# EAGLE board Dragino Pan.v2.0.1 (EAGLE 7.5.0), part 1 of 2
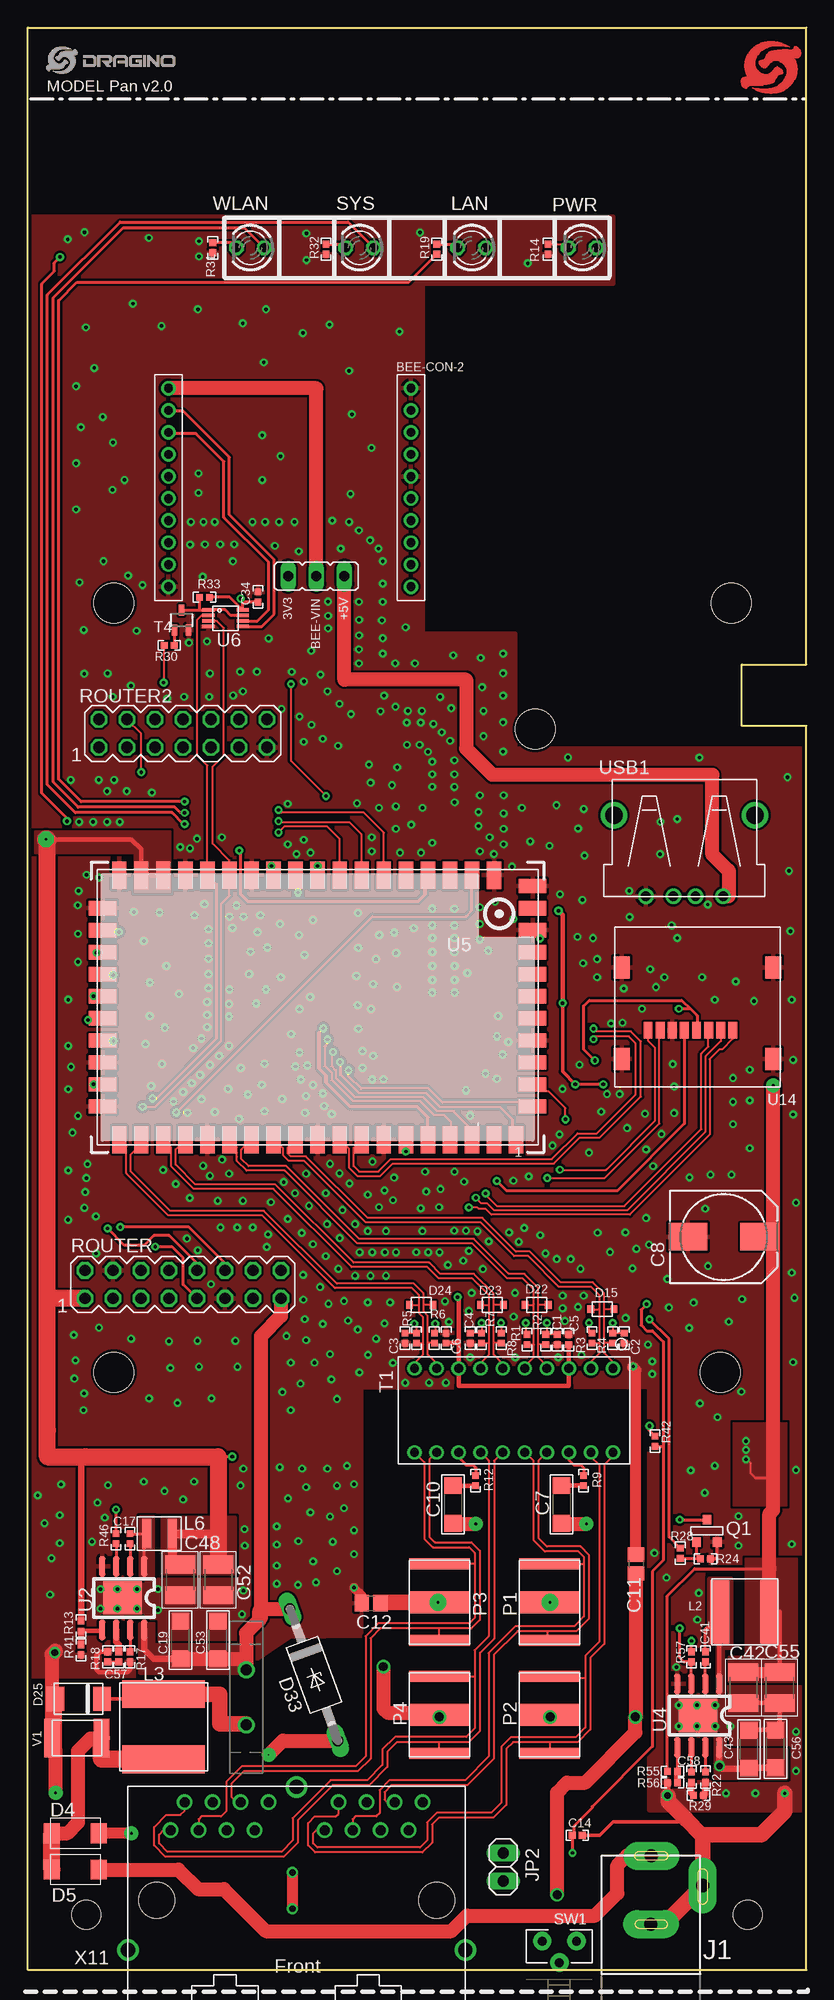
[diagram p0: board, top side]
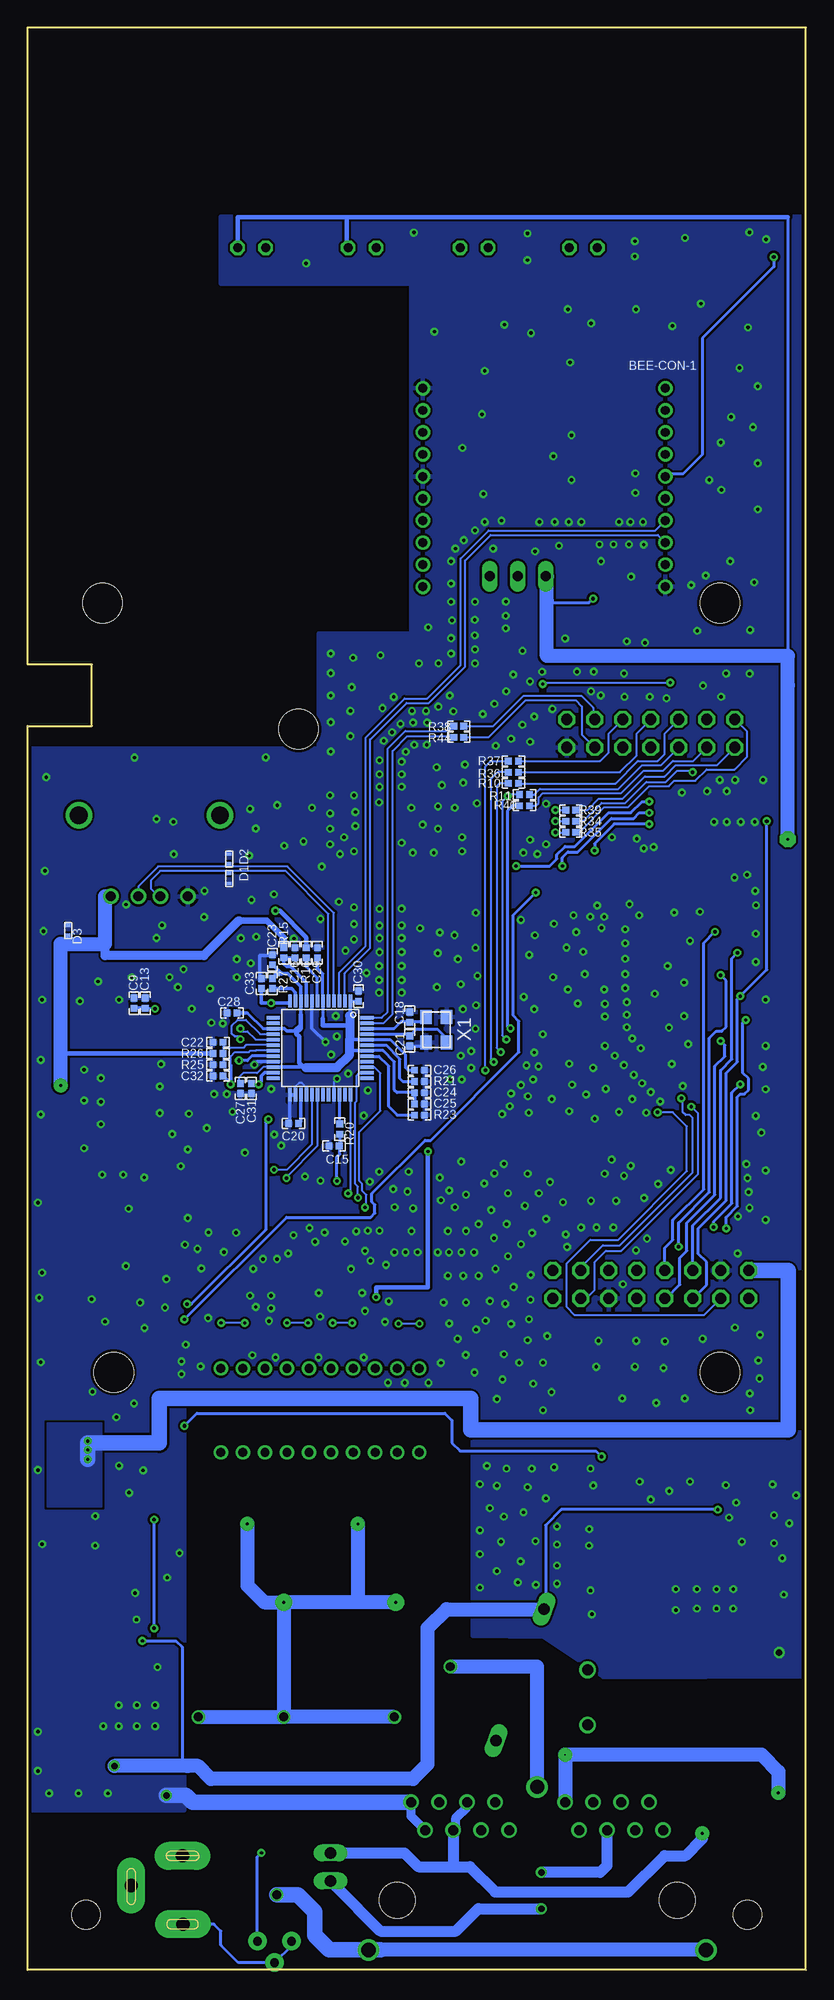
[diagram p1: board, bottom side, seen from below]

Size 70.61 x 176.23 mm. Coordinates in mm from the lower left corner, seen from the top.
Outline: 0,0 70.61,0 70.61,112.86 64.77,112.86 64.77,118.45 70.61,118.45 70.61,176.23 0,176.23 0,0
Copper layers (1*16): Top 0.035mm / dielectric 1.5mm / Bottom 0.035mm
Design rules "default *": minimum track width 8mil, minimum drill 12mil, track to track 8mil, track to pad 8mil, pad to pad 6mil, via to via 8mil, smd to smd 8mil, copper to edge 10mil, drill to drill 8mil, minimum pad ring 10mil, minimum via ring 8mil, stop-mask expansion 1mil, vias tented up to drill 30mil, thermal gap 10mil
Net classes: 0 default: clearance 0.205 mm; 2 gnd: width 0.305 mm, drill 0.33 mm, clearance 0.254 mm; 3 usbvcc: width 0.254 mm, drill 0.61 mm, clearance 0.254 mm; 5 usbtrace: width 0.254 mm, clearance 0.152 mm; 6 usbtrace-4layer: width 0.191 mm, clearance 0.203 mm
Holes 3.6 mm at 62.81,54.22 7.81,54.22 63.81,124 7.81,124 46.03,112.57
Holes 2.6 mm at 65.31,5 5.31,5
tKeepout: area 4.8,53 to 10.8,59; area 59.8,53 to 65.8,59; area 60.8,121 to 66.8,127; area 4.8,121 to 10.8,127

## Footprints (pad centres in the part's own frame; a part is rotated, then mirrored left to right if it is on the bottom)
10P-2.0MM = drill 0.8 pad 1.27: 1 0,9; 2 0,7; 3 0,5; 4 0,3; 5 0,1; 6 0,-1; 7 0,-3; 8 0,-5; 9 0,-7; 10 0,-9
JP2 = drill 0.914 long: 1 -2.54,0; 2 0,0; 3 2.54,0
C0402 = smd 0.61 x 0.61: 1 -0.457,0; 2 0.457,0
C1206 = smd 1.52 x 1.6: 1 -1.71,0; 2 1.71,0
140CLH-0810 = smd 3.5 x 2.5: + 3.25,0; - -3.25,0
C0805 = smd 1.3 x 1.5: 1 -0.85,0; 2 0.85,0
C1210 = smd 1.6 x 2.7: 1 -1.4,0; 2 1.4,0
SOD−923 = smd 0.3 x 0.4: P$1 -0.45,0; P$2 0.45,0
DO214AC = smd 1.45 x 1.8: A 2.13,0; C -2.13,0
SOD−323 = smd 0.6 x 0.7: P$1 -1.05,0; P$2 1.05,0
DO-214AA = smd 1.62 x 2.18: A 2.11,0; C -2.11,0
F126Z12 = drill 1.016 long: A 6.35,0; C -6.35,0
GR72-135 = drill 1: P$1 -2.5,0; P$2 2.5,0
POWER_JACK_SLOT = drill 1.2 pad 2.54 long: GND@1 0,0; GND@2 4.7,3.5; PWR 0.04,6.2
1X02 = drill 1.016 long: 1 -1.27,0; 2 1.27,0
SWPA6028S = smd 5.7 x 1.7: P$1 0,2.25; P$2 0,-2.25
LVS808040 = smd 2.5 x 7.5: P$1 -2.95,0; P$2 2.95,0
SWPA3010S = smd 0.8 x 2.7: P$1 -1.15,0; P$2 1.15,0
LED3MM = drill 0.813 octagon: A -1.27,0; K 1.27,0
GDT-LT-B3D090L = smd 1 x 5.5: 1 -3.48,0; 3 3.48,0 | smd 2 x 5.5: 2 0,0
SOT-23 = smd 0.787 x 0.889: 1 0,-1.016; 2 -0.95,1.016; 3 0.95,1.016
R0402 = smd 0.61 x 0.61: 1 -0.457,0; 2 0.457,0
MA08-2 = drill 1.016 octagon: 1 -8.89,-1.27; 2 -8.89,1.27; 3 -6.35,-1.27; 4 -6.35,1.27; 5 -3.81,-1.27; 6 -3.81,1.27; 7 -1.27,-1.27; 8 -1.27,1.27; 9 1.27,-1.27; 10 1.27,1.27; 11 3.81,-1.27; 12 3.81,1.27; 13 6.35,-1.27; 14 6.35,1.27; 15 8.89,-1.27; 16 8.89,1.27
MA07-2 = drill 1.016 octagon: 1 -7.62,-1.27; 2 -7.62,1.27; 3 -5.08,-1.27; 4 -5.08,1.27; 5 -2.54,-1.27; 6 -2.54,1.27; 7 0,-1.27; 8 0,1.27; 9 2.54,-1.27; 10 2.54,1.27; 11 5.08,-1.27; 12 5.08,1.27; 13 7.62,-1.27; 14 7.62,1.27
TS-026 = drill 0.8 pad 1.676: 1 -1.55,-0.975; 2 1.55,-0.975; 3 0,0.975
RIONET_H2038 = drill 0.8: 1 -3.81,9; 2 -3.81,7; 3 -3.81,5; 4 -3.81,3; 5 -3.81,1; 6 -3.81,-1; 7 -3.81,-3; 8 -3.81,-5; 9 -3.81,-7; 10 -3.81,-9; 11 3.81,-9; 12 3.81,-7; 13 3.81,-5; 14 3.81,-3; 15 3.81,-1; 16 3.81,1; 17 3.81,3; 18 3.81,5; 19 3.81,7; 20 3.81,9
SOT323 = smd 0.5 x 1: 1 0,0.9; 2 -0.65,-0.9; 3 0.65,-0.9
RT8250-SOP8 = smd 1.88 x 0.61: 1 -1.219,0; 2 -1.219,-1.27; 3 -1.219,-2.54; 4 -1.219,-3.81; 5 4.547,-3.81; 6 4.547,-2.54; 7 4.547,-1.27; 8 4.547,0 | smd 2.997 x 3.505: 9 1.651,-1.956
AU6350_LQFP-48 = smd 1.2 x 0.3: 1 -4.25,2.75; 2 -4.25,2.25; 3 -4.25,1.75; 4 -4.25,1.25; 5 -4.25,0.75; 6 -4.25,0.25; 7 -4.25,-0.25; 8 -4.25,-0.75; 9 -4.25,-1.25; 10 -4.25,-1.75; 11 -4.25,-2.25; 12 -4.25,-2.75; 25 4.25,-2.75; 26 4.25,-2.25; 27 4.25,-1.75; 28 4.25,-1.25; 29 4.25,-0.75; 30 4.25,-0.25; 31 4.25,0.25; 32 4.25,0.75; 33 4.25,1.25; 34 4.25,1.75; 35 4.25,2.25; 36 4.25,2.75 | smd 0.3 x 1.2: 13 -2.75,-4.25; 14 -2.25,-4.25; 15 -1.75,-4.25; 16 -1.25,-4.25; 17 -0.75,-4.25; 18 -0.25,-4.25; 19 0.25,-4.25; 20 0.75,-4.25; 21 1.25,-4.25; 22 1.75,-4.25; 23 2.25,-4.25; 24 2.75,-4.25; 37 2.75,4.25; 38 2.25,4.25; 39 1.75,4.25; 40 1.25,4.25; 41 0.75,4.25; 42 0.25,4.25; 43 -0.25,4.25; 44 -0.75,4.25; 45 -1.25,4.25; 46 -1.75,4.25; 47 -2.25,4.25; 48 -2.75,4.25
DRAGINO_HE-4025 = smd 1.3 x 2.5: 1 -18,12; 2 -16,12; 3 -14,12; 4 -12,12; 5 -10,12; 6 -8,12; 7 -6,12; 8 -4,12; 9 -2,12; 10 0,12; 11 2,12; 12 4,12; 13 6,12; 14 8,12; 15 10,12; 16 12,12; 17 14,12; 18 16,12; 19 18,12; 30 18,-12; 31 16,-12; 32 14,-12; 33 12,-12; 34 10,-12; 35 8,-12; 36 6,-12; 37 4,-12; 38 2,-12; 39 0,-12; 40 -2,-12; 41 -4,-12; 42 -6,-12; 43 -8,-12; 44 -10,-12; 45 -12,-12; 46 -14,-12; 47 -16,-12 | smd 2.5 x 1.3: 20 19.5,9; 21 19.5,7; 22 19.5,5; 23 19.5,3; 24 19.5,1; 25 19.5,-1; 26 19.5,-3; 27 19.5,-5; 28 19.5,-7; 29 19.5,-9; 48 -19.5,-11; 49 -19.5,-9; 50 -19.5,-7; 51 -19.5,-5; 52 -19.5,-3; 53 -19.5,-1; 54 -19.5,1; 55 -19.5,3; 56 -19.5,5; 57 -19.5,7; 58 -19.5,9
US8 = smd 0.3 x 1.1: 1 -0.75,-1.55; 2 -0.25,-1.55; 3 0.25,-1.55; 4 0.75,-1.55; 5 0.75,1.55; 6 0.25,1.55; 7 -0.25,1.55; 8 -0.75,1.55
RIONET_472192001_SD = smd 0.8 x 1.5: 1 3.2,-1.55; 2 2.1,-1.55; 3 1,-1.55; 4 -0.1,-1.55; 5 -1.2,-1.55; 6 -2.3,-1.55; 7 -3.4,-1.55; 8 -4.5,-1.55 | smd 1.45 x 2: G1 6.875,-4.15; G2 6.875,4.15; G3 -6.875,4.15; G4 -6.875,-4.15
USB_C42562 = drill 0.9: 1 -3.5,5.29; 2 -1,5.29; 3 1,5.29; 4 3.5,5.29 | drill 1.6: P$1 -6.4,-2.06; P$2 6.4,-2.06
BC301N-D = smd 1.4 x 3.5: P$1 -2.25,0; P$2 2.25,0
SMARTPRJ_CRYSTAL-3.2-2.5 = smd 1.3 x 1.05: 1 -1.15,-0.925; 2 1.15,-0.925; 3 1.15,0.925; 4 -1.15,0.925
EHERNET-1X2-PLASTIC1 = drill 0.9: 1-1 2.54,-7.49; 1-2 3.81,-4.95; 1-3 5.08,-7.49; 1-4 6.35,-4.95; 1-5 7.62,-7.49; 1-6 8.89,-4.95; 1-7 10.16,-7.49; 1-8 11.43,-4.95; 2-1 -11.43,-7.49; 2-2 -10.16,-4.95; 2-3 -8.89,-7.49; 2-4 -7.62,-4.95; 2-5 -6.35,-7.49; 2-6 -5.08,-4.95; 2-7 -3.81,-7.49; 2-8 -2.54,-4.95 | drill 1.3: P$1 0,-8.89; P$2 -15.3,5.9; P$3 15.3,5.9 | hole 3.25: -12.7,1.4; 12.7,1.4

## Placement (x,y rotation side)
BEE-CON-1  BEE-1  [10P-2.0MM]  12.75,134.5 0 top
BEE-CON-2  BEE-1  [10P-2.0MM]  34.75,134.5 0 top
BEE-VIN  1x3 , 2.54 弯针  [JP2]  26.16,126.45 0 top
C1  0.1uF  [C0402]  48.03,57.19 270 top
C2  0.1uF  [C0402]  54.09,57.32 270 top
C3  0.1uF  [C0402]  34.22,57.32 270 top
C4  0.1uF  [C0402]  40.13,57.32 270 top
C5  0.1uF  [C0402]  49.07,57.19 90 top
C6  0.1uF  [C0402]  37.94,57.32 90 top
C7  1000pF 2kv  [C1206]  48.42,42.23 270 top
C8  470uF 10v  [140CLH-0810]  63.12,66.5 0 top
C9  0.1uF  [C0402]  60.96,87.71 90 bottom
C10  1000pF 2kv  [C1206]  38.58,42.23 270 top
C11  0.1uF,100V  [C0805]  55.15,36.83 270 top
C12  0.1uF,100V  [C0805]  31.14,33.26 0 top
C13  1uF  [C0402]  59.94,87.71 90 bottom
C14  1pf  [C0402]  49.84,12.2 0 top
C15  10pf,NL  [C0402]  42.8,74.76 180 bottom
C16  2.2uF  [C0402]  46.35,92.29 90 bottom
C17  0.1u,50v  [C0402]  9.27,39.12 90 top
C18  18pF  [C0402]  35.94,86.44 90 bottom
C19  10uf,50v  [C1206]  13.84,29.93 90 top
C20  1uF  [C0402]  46.48,76.79 180 bottom
C21  18pF  [C0402]  35.94,84.28 270 bottom
C22  1uF  [C0402]  53.34,84.16 180 bottom
C23  4.7uF  [C0402]  48.39,91.65 90 bottom
C24  4.7uF  [C0402]  35.05,79.59 0 bottom
C25  1uF  [C0402]  35.05,78.57 0 bottom
C26  4.7uF  [C0402]  35.05,81.62 0 bottom
C27  0.1uF  [C0402]  51.31,79.97 270 bottom
C28  0.1uF  [C0402]  52.07,86.83 180 bottom
C29  0.1uF  [C0402]  44.32,92.29 90 bottom
C30  0.1uF  [C0402]  40.59,88.35 90 bottom
C31  4.7uF  [C0402]  50.29,79.97 270 bottom
C32  4.7uF  [C0402]  53.34,81.11 180 bottom
C33  0.1uF  [C0402]  49.4,89.49 90 bottom
C34  0.1u  [C0402]  20.88,124.57 90 top
C41  0.1u,50v  [C0402]  61.47,28.41 90 top
C42  22uf,10v  [C1210]  64.9,25.61 270 top
C43  10uf,50v  [C1206]  65.41,20.02 90 top
C48  22uF,10v  [C1210]  13.82,35.39 270 top
C52  22uF,10v  [C1210]  17.27,35.39 270 top
C53  10uf,50v  [C1206]  17.25,29.93 90 top
C55  22fu,10v  [C1210]  68.2,25.61 270 top
C56  10uf,50v  [C1206]  67.82,20.05 90 top
C57  2.7nf  [C0402]  8.25,28.41 90 top
C58  2.7nf  [C0402]  60.2,17.48 90 top
D1  ESD7951ST5G  [SOD−923]  52.32,99.02 270 bottom
D2  ESD7951ST5G  [SOD−923]  52.32,100.8 90 bottom
D3  ESD7951ST5G  [SOD−923]  66.93,94.32 90 bottom
D4  STPS1L30  [DO214AC]  4.32,12.4 0 top
D5  STPS1L30  [DO214AC]  4.32,9.1 0 top
D15  BS05C  [SOD−323]  52.11,59.95 0 top
D22  BS05C  [SOD−323]  46.15,60.33 0 top
D23  BS05C  [SOD−323]  42.11,60.33 0 top
D24  BS05C  [SOD−323]  35.69,60.33 0 top
D25  SMBJ43A  [DO-214AA]  4.61,24.59 180 top
D33  1N4001  [F126Z12]  25.94,26.77 290 top
F2  GRD-GR72-135 1.35A  [GR72-135]  19.81,24.72 90 top
J1  POWER_JACKSLT  [POWER_JACK_SLOT]  56.52,4.15 0 top
JP2  [1X02]  43.13,9.33 270 top
L2  6.8uH / SWPA6045S6R8MT  [SWPA6028S]  65.02,32.47 90 top
L3  100uH, 1.4A, LVS808040-101  [LVS808040]  12.32,22.06 90 top
L6  4.7uH /SWPA3015S4R7MT  [SWPA3010S]  11.94,39.58 0 top
LAN  [LED3MM]  40.26,156.25 180 top
P1  3R420L  [GDT-LT-B3D090L]  47.31,33.36 270 top
P2  3R420L  [GDT-LT-B3D090L]  47.31,23.14 270 top
P3  3R420L  [GDT-LT-B3D090L]  37.34,33.36 270 top
P4  3R420L  [GDT-LT-B3D090L]  37.34,23.14 270 top
PWR  [LED3MM]  50.29,156.25 180 top
Q1  BSS138-7-F  [SOT-23]  61.59,39.84 180 top
R1  49.9  [R0402]  45.29,57.19 270 top
R2  49.9  [R0402]  46.99,57.19 270 top
R3  49.9  [R0402]  51.18,57.32 270 top
R4  49.9  [R0402]  53.05,57.32 270 top
R5  49.9  [R0402]  35.26,57.32 270 top
R6  49.9  [R0402]  36.88,57.32 270 top
R7  49.9  [R0402]  41.14,57.32 270 top
R8  49.9  [R0402]  42.95,57.32 270 top
R9  75  [R0402]  50.41,44.4 90 top
R10  0R  [R0402]  26.54,107.65 180 bottom
R11  0R  [R0402]  25.53,106.64 0 bottom
R12  75  [R0402]  40.61,44.39 90 top
R13  75K 1%  [R0402]  4.83,31.2 90 top
R14  330  [R0402]  47.18,156.13 90 top
R15  0R  [R0402]  47.37,92.29 270 bottom
R16  0R  [R0402]  45.34,92.29 270 bottom
R17  180K  [R0402]  9.27,28.41 270 top
R18  16K 1%  [R0402]  7.24,28.41 270 top
R19  330  [R0402]  37.08,156.13 90 top
R20  0R  [R0402]  42.29,76.28 270 bottom
R21  680  [R0402]  35.05,80.6 180 bottom
R22  180K  [R0402]  61.47,17.48 270 top
R23  330  [R0402]  35.05,77.55 0 bottom
R24  47K,NL  [R0402]  61.47,37.3 180 top
R25  470K  [R0402]  53.34,82.13 180 bottom
R26  47K  [R0402]  53.34,83.14 180 bottom
R27  0R  [R0402]  48.39,89.49 270 bottom
R28  4.7k  [R0402]  59.18,37.8 270 top
R29  24K  [R0402]  60.83,15.83 0 top
R30  4.7K  [R0402]  12.83,120.18 180 top
R31  330  [R0402]  16.76,156.25 90 top
R32  330  [R0402]  27.05,156.13 90 top
R33  100K  [R0402]  16.03,124.54 0 top
R34  0R  [R0402]  21.34,104.22 180 bottom
R35  0R  [R0402]  21.34,103.21 180 bottom
R36  0R  [R0402]  26.54,108.67 180 bottom
R37  0R  [R0402]  26.54,109.69 180 bottom
R38  0R,NL  [R0402]  31.5,112.86 180 bottom
R39  0R  [R0402]  21.34,105.24 0 bottom
R40  0R  [R0402]  25.53,105.62 0 bottom
R41  24K 1%  [R0402]  4.83,29.04 90 top
R42  10K  [R0402]  56.9,47.96 270 top
R44  0R,NL  [R0402]  31.5,111.84 0 bottom
R46  100K  [R0402]  8,39.12 270 top
R55  53.6K 1%  [R0402]  58.47,18.02 180 top
R56  10K 1%  [R0402]  58.47,16.97 0 top
R57  100K  [R0402]  60.2,28.41 90 top
ROUTER  [MA08-2]  14.07,62.19 0 top
ROUTER2  [MA07-2]  14.07,112.19 0 top
SW1  TS-026  [TS-026]  48.21,1.62 180 top
SYS  [LED3MM]  30.1,156.25 180 top
T1  RJ45_TRANSFORMER_HST2038DR  [RIONET_H2038]  44.08,50.76 270 top
T4  2SC4081/SC70  [SOT323]  13.94,122.46 0 top
U2  RT7272  [RT8250-SOP8]  10.54,35.39 270 top
U3  AU6353  [AU6350_LQFP-48]  44.07,83.65 270 bottom
U4  RT7272  [RT8250-SOP8]  62.74,24.72 270 top
U5  DRAGINO_HE-4025  [DRAGINO_HE-4025]  26.29,87.33 180 top
U6  NC7WZ125  [US8]  17.93,122.64 270 top
U14  [RIONET_472192001_SD]  60.76,86.8 0 top
U$3  LOGO-NEW  [LOGO-SILK-NEW]  1.67,172.05 0 top
U$7  [DRGAINO_LOGO_STOP]  64.51,170.07 0 top
USB1  USB_C42562  [USB_C42562]  59.56,102.7 180 top
V1  BC301N-D  [BC301N-D]  4.44,21.04 0 top
WLAN  [LED3MM]  20.19,156.25 180 top
X1  12Mhz  [SMARTPRJ_CRYSTAL-3.2-2.5]  33.53,85.3 270 bottom
X11  EHERNET-1X2-PLASTIC  [EHERNET-1X2-PLASTIC1]  24.38,7.72 180 top

## Library data of the parts
BEE-CON-1 BEE-CON-2 C7 C10-C12 C19 C34 C42 C43 C48 C52 C53 C55 C56 L2 USB1 X11 = dragino-passive
BEE-VIN C1-C6 C8 C9 C13-C18 C20-C33 C41 C57 C58 D1-D5 D15 D22-D25 F2 J1 L3 L6 P1-P4 R1-R42 R44 R46 R55-R57 T1 U2-U6 U14 U$3 U$7 V1 = dragino
D33 = diode
JP2 = pinhead
LAN PWR SYS WLAN = led
Q1 ROUTER ROUTER2 = dragino; OC_FARNELL: unknown; OC_NEWARK: unknown
SW1 = _RoweTel
T4 = zetex; MPN: DSS4160U-7; OC_FARNELL: 1710696; OC_NEWARK: 25R4558
X1 = rionita7

## Nets
2.0V_CTL: C5.1 C6.1 T1.3 T1.8 U5.6
+3V3: BEE-VIN.1 C34.1 C48.1 C52.1 L6.P$2 LAN.A PWR.A R13.2 R33.2 R42.1 ROUTER.1 U5.31 U5.32 U6.8
+5V: BEE-VIN.3 C8.+ C42.1 C55.1 D3.P$1 L2.P$2 R15.1 R26.2 R55.2 ROUTER.2 USB1.1
/BEE_OE: R33.1 T4.1 U6.1 U6.7
/RESET_HE: ROUTER.3 U5.46
BEE-RXD: BEE-CON-1.3 U6.6
BEE-TXD: BEE-CON-1.2 U6.5
BEE-VIN: BEE-CON-1.1 BEE-VIN.2
CHIP_RESETN: C22.1 R25.1 R26.1 U3.18
CPWR_V33: C9.1 C13.1 U3.20 U14.4
DC-VIN: D5.A J1.PWR
DP1_OVRCUR: U3.14
DP1_PWRUP: U3.13
GND: BEE-CON-1.10 BEE-CON-2.1 BEE-CON-2.5 C1.2 C2.2 C3.2 C4.2 C5.2 C6.2 C8.- C9.2 C11.1 C12.1 C13.2 C14.2 C15.2 C16.2 C18.2 C19.2 C20.2 C21.2 C22.2 C23.2 C24.2 C25.2 C26.2 C27.2 C28.2 C29.2 C30.2 C31.2 C32.2 C33.2 C34.2 C42.2 C43.2 C48.2 C52.2 C53.2 C55.2 C56.2 D1.P$2 D2.P$2 D3.P$2 D25.A D33.A J1.GND@1 J1.GND@2 Q1.2 R14.1 R17.2 R18.1 R21.1 R22.2 R23.2 R24.1 R25.2 R29.2 R31.1 R32.1 R41.1 R56.1 ROUTER2.13 ROUTER.4 ROUTER.11 SW1.2 SW1.3 T4.3 U2.4 U2.9 U3.8 U3.21 U3.25 U3.26 U3.28 U3.33 U4.4 U4.9 U5.7 U5.10 U5.15 U5.20 U5.22 U5.29 U5.30 U5.33 U5.36 U5.47 U5.48 U5.50 U5.55 U6.4 U14.6 U14.G1 U14.G2 U14.G3 U14.G4 USB1.4 V1.P$1 X1.2 X1.4 X11.1-1 X11.2-1 X11.2-2
GPIO1: R28.1 U5.38
GPIO6: R36.2 U5.1
GPIO7: R37.2 U5.58
GPIO8: R10.2 U5.3
GPIO14: R35.2 U5.40
GPIO15: R34.2 U5.41
GPIO16: R39.1 U5.42
GPIO18: ROUTER.10 U5.24
GPIO19: ROUTER.6 U5.27
GPIO20: BEE-CON-1.5 ROUTER.5 U5.25
GPIO21: ROUTER.8 U5.28
GPIO22: ROUTER.7 U5.23
GPIO23: ROUTER.9 U5.26
GPIO24: ROUTER.12 U5.21
GPIO26: R40.1 U5.5
GPIO27: R11.1 R30.2 U5.4
JUMPSTART: C14.1 R42.2 SW1.1 U5.57
LAN_LED: R19.1 U5.39
LED_SYS: SYS.A U5.44
N$1: C1.1 R1.1 R2.1
N$2: C17.2 L6.P$1 U2.1
N$3: C2.1 R3.1 R4.1
N$4: C3.1 R5.1 R6.1
N$5: C4.1 R7.1 R8.1
N$6: PWR.K R14.2
N$7: R23.1 U3.41
N$8: C20.1 U3.27
N$9: C57.1 R18.2
N$10: R9.2 T1.18
N$11: R35.1 ROUTER2.2
N$12: C7.1 R9.1
N$13: C57.2 U2.6
N$14 [gnd]: R55.1 R56.2 U4.5
N$15: Q1.1 R57.1 U4.3
N$16: R21.2 U3.43
N$17: R12.2 T1.13
N$18: C10.1 R12.1
N$19: R22.1 U4.7
N$20: Q1.3 R24.2 R28.2
N$21: C58.2 U4.6
N$22: C15.1 R20.2 U14.5
N$23: LAN.K R19.2
N$24: R27.2 U3.11
N$25: R46.2 U2.3
N$26: R17.1 U2.7
N$27: C17.1 U2.2
N$28: C58.1 R29.1
N$29: C16.1 R15.2 U3.9
N$30: R16.2 U3.7
N$31: R31.2 WLAN.K
N$32: R32.2 SYS.K
N$33: R39.2 ROUTER2.1
N$34: C41.2 L2.P$1 U4.1
N$35: R11.2 ROUTER2.5
N$36: R30.1 T4.2
N$38: ROUTER.16
N$39: R10.1 ROUTER2.6
N$43: R40.2 ROUTER2.3
N$49: R13.1 R41.2 U2.5
N$50: R34.1 ROUTER2.4
N$53: D25.C F2.P$1 L3.P$2
N$54: R36.1 ROUTER2.8
N$55: C41.1 U4.2
N$56: R37.1 ROUTER2.10
OPTIONAL_ANT: U5.49
P0_R_N: P1.3 T1.17 X11.2-3
P0_R_P: P1.1 T1.16 X11.2-6
P0_RX_N: D22.P$2 R2.2 T1.4 U5.13
P0_RX_P: D22.P$1 R1.2 T1.5 U5.14
P0_T_N: P2.3 T1.20 X11.2-7
P0_T_P: P2.1 T1.19 X11.2-8
P0_TX_N: D15.P$2 R4.2 T1.1 U5.11
P0_TX_P: D15.P$1 R3.2 T1.2 U5.12
P4_R_N: P3.3 T1.12 X11.1-3
P4_R_P: P3.1 T1.11 X11.1-6
P4_RX_N: D24.P$2 R6.2 T1.9 U5.18
P4_RX_P: D24.P$1 R5.2 T1.10 U5.19
P4_T_N: P4.3 T1.15 X11.1-7
P4_T_P: P4.1 T1.14 X11.1-8
P4_TX_N: D23.P$2 R8.2 T1.6 U5.16
P4_TX_P: D23.P$1 R7.2 T1.7 U5.17
PE: C7.2 C10.2 C11.2 C12.2 P1.2 P2.2 P3.2 P4.2 X11.P$1 X11.P$2 X11.P$3
POE_PASSTHROUGH: JP2.2 X11.1-4
POE_VIN: D4.A JP2.1 X11.2-4 X11.2-5
RF_CSN: U5.52
RF_MISO: U5.56
RF_MOSI: U5.54
RF_RESET: U5.51
RF_SCK: U5.53
SD_CLK: R20.1 U3.34
SD_CMD: U3.36 U14.3
SD_DAT0: U3.30 U14.7
SD_DAT1: U3.29 U14.8
SD_DAT2: U3.39 U14.1
SD_DAT3: U3.38 U14.2
UART_RX: ROUTER.13 U5.35 U6.3
UART_TX: ROUTER.14 U5.34 U6.2
USB2_D1_N: R44.2 ROUTER2.11
USB2_D1_P: R38.1 ROUTER2.12
USB2_D_N: R44.1 U3.47
USB2_D_P: R38.2 U3.48
USB3_D_N [usbtrace]: BEE-CON-1.8 U3.2
USB3_D_P [usbtrace]: BEE-CON-1.7 U3.3
USB4_D_N [usbtrace-4layer]: D2.P$1 U3.4 USB1.2
USB4_D_P [usbtrace-4layer]: D1.P$1 U3.5 USB1.3
USB_N: U3.17 U5.9
USB_P: U3.16 U5.8
VCC1.8: C31.1 C32.1 C33.1 R16.1 U3.12 U3.19 U3.23
VCC3.3: C23.1 C24.1 C25.1 C26.1 C27.1 C28.1 C29.1 C30.1 R27.1 U3.1 U3.6 U3.10 U3.15 U3.22 U3.42 U3.44
VDD: C19.1 C43.1 C53.1 C56.1 D33.C F2.P$2 R46.1 R57.2 ROUTER.15 U2.8 U4.8
VIN1: D4.C D5.C L3.P$1 V1.P$2
WAN_LED: U5.43
WLAN_LED: U5.37 WLAN.A
XSCI: C18.1 U3.46 X1.1
XSCO: C21.1 U3.45 X1.3